# Altium PCB PCB1.PcbDoc (part 1 of 2)
Units mm, origin at the board's own origin, x right, y up, seen from the top; angles counter-clockwise.
Board outline 94.96 x 71.5 mm, 2 copper layers (Top Layer, Bottom Layer), stack 1.58 mm thick; 82 components, 66 nets, 273 pads, 293 vias.
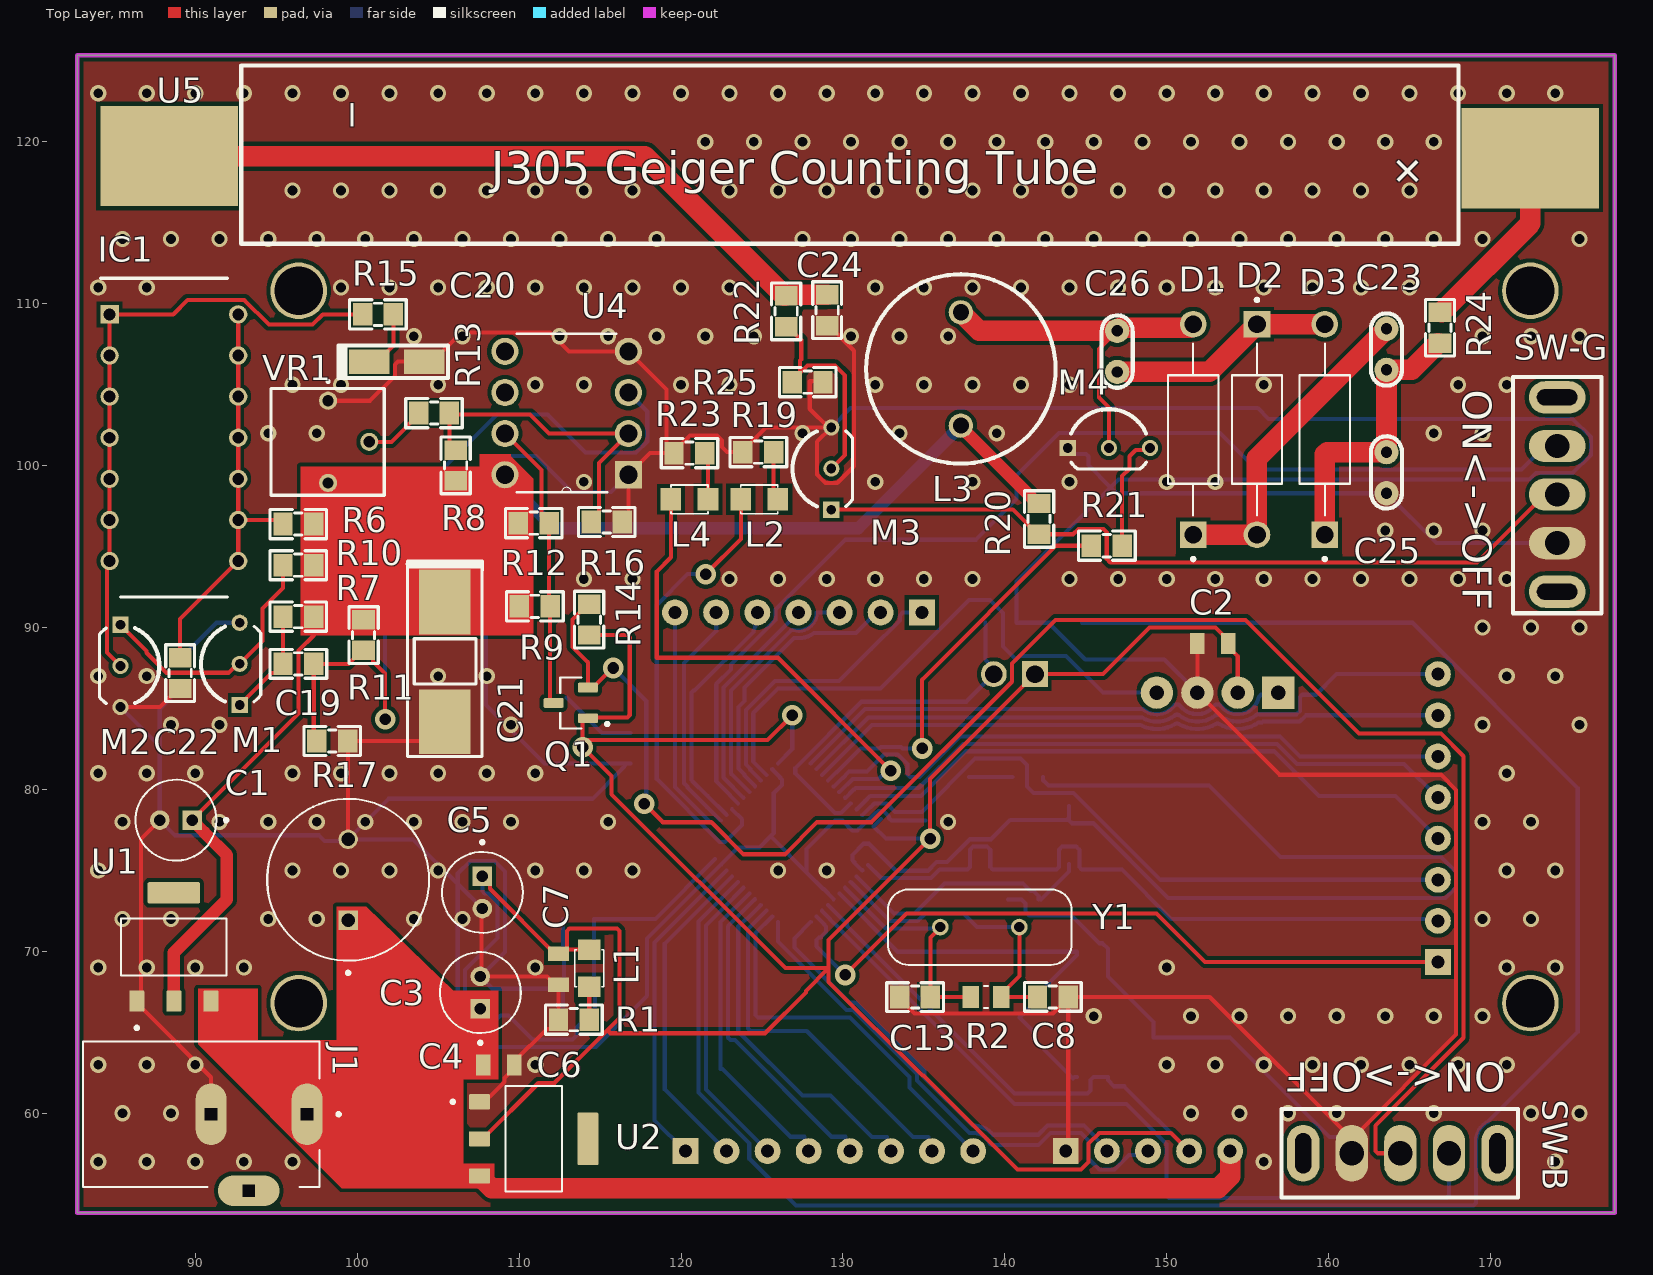
[diagram p0: Top Layer view]
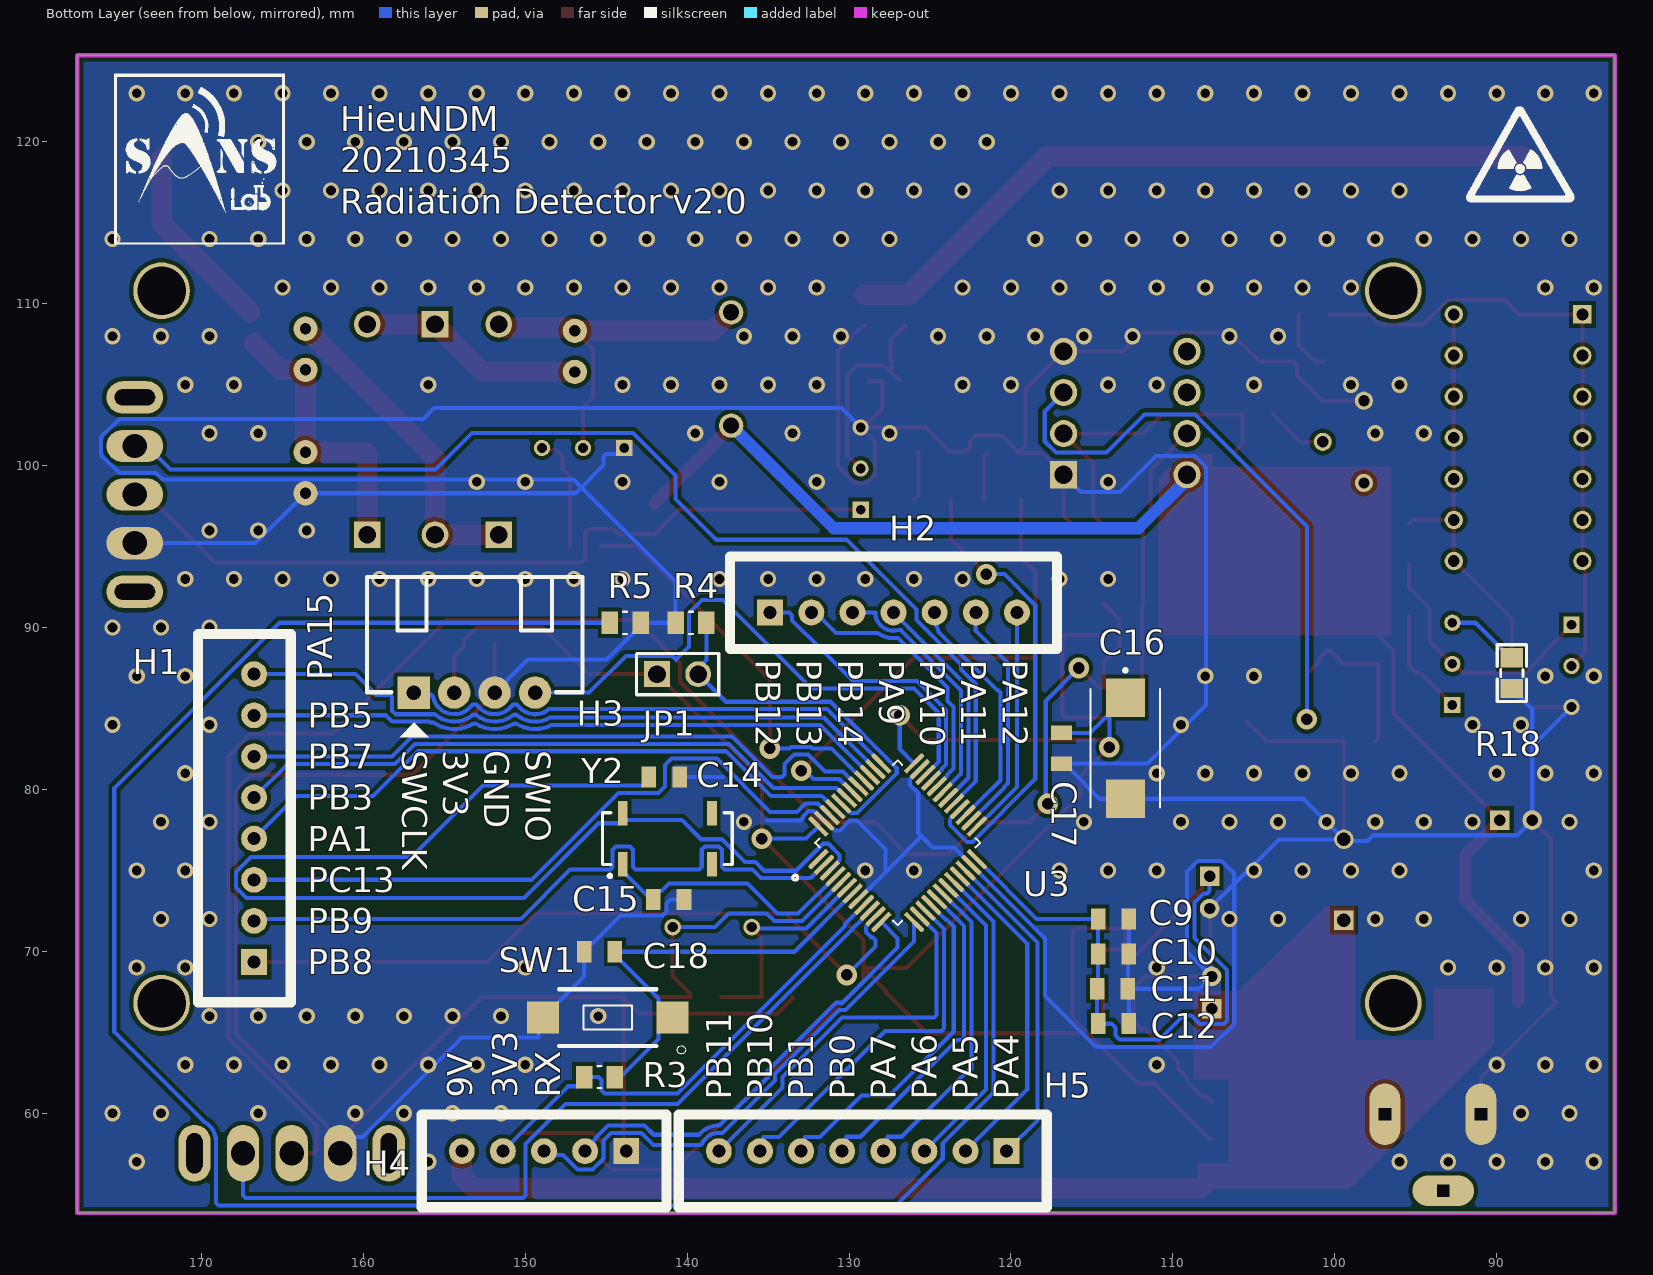
[diagram p1: Bottom Layer view, seen from below]
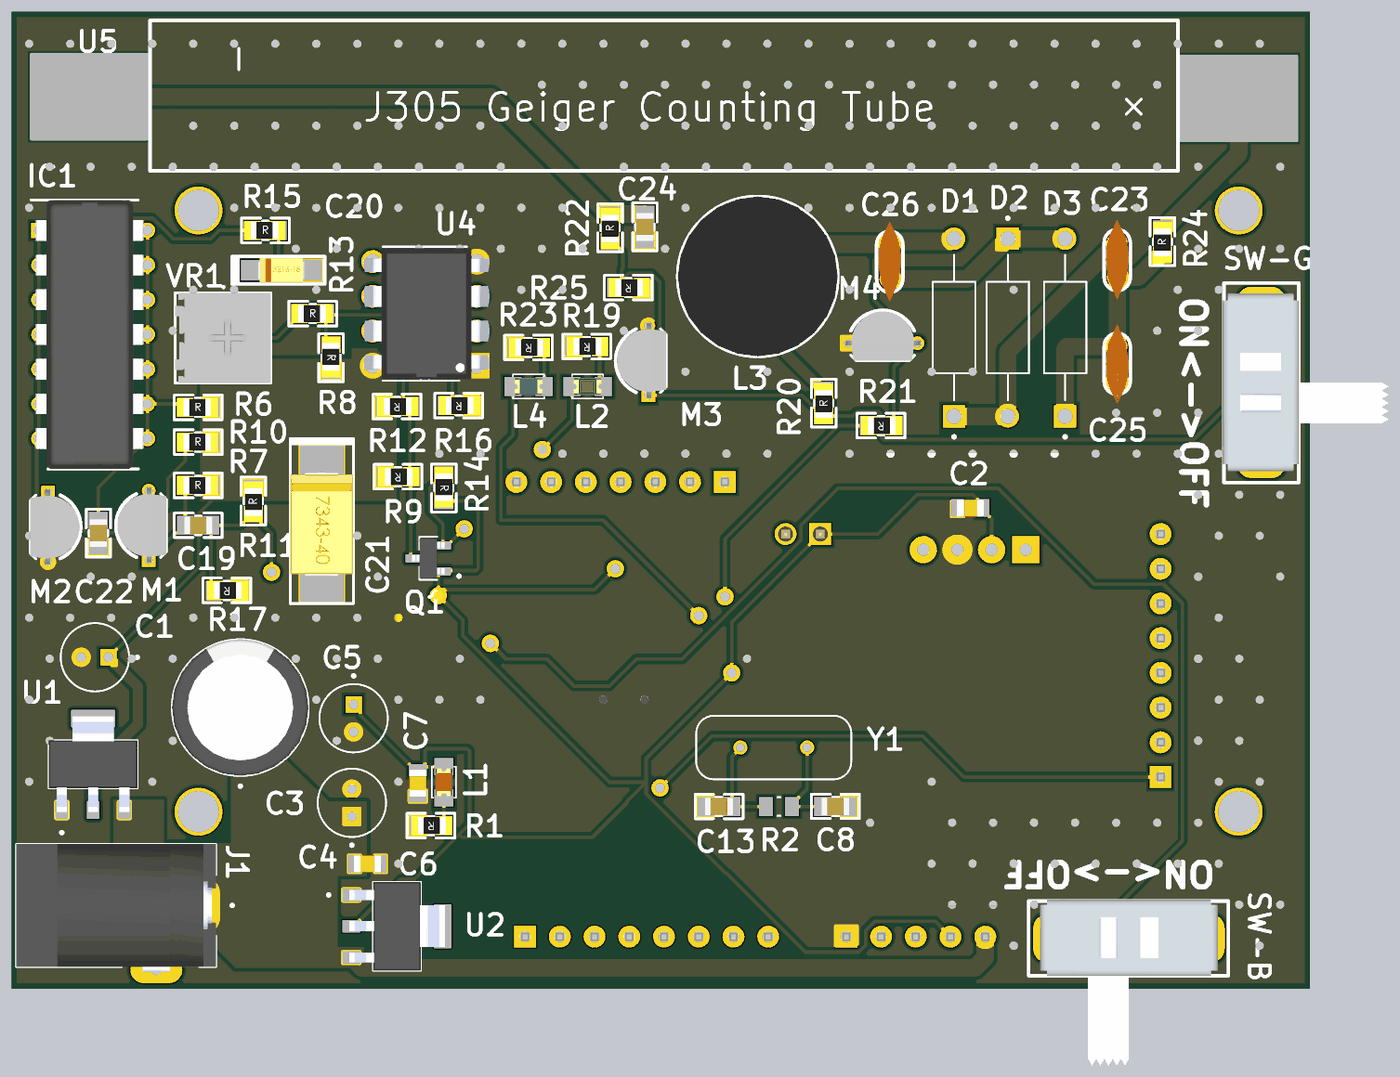
[diagram p2: 3D render of the assembled board from above, using the file's embedded part models]
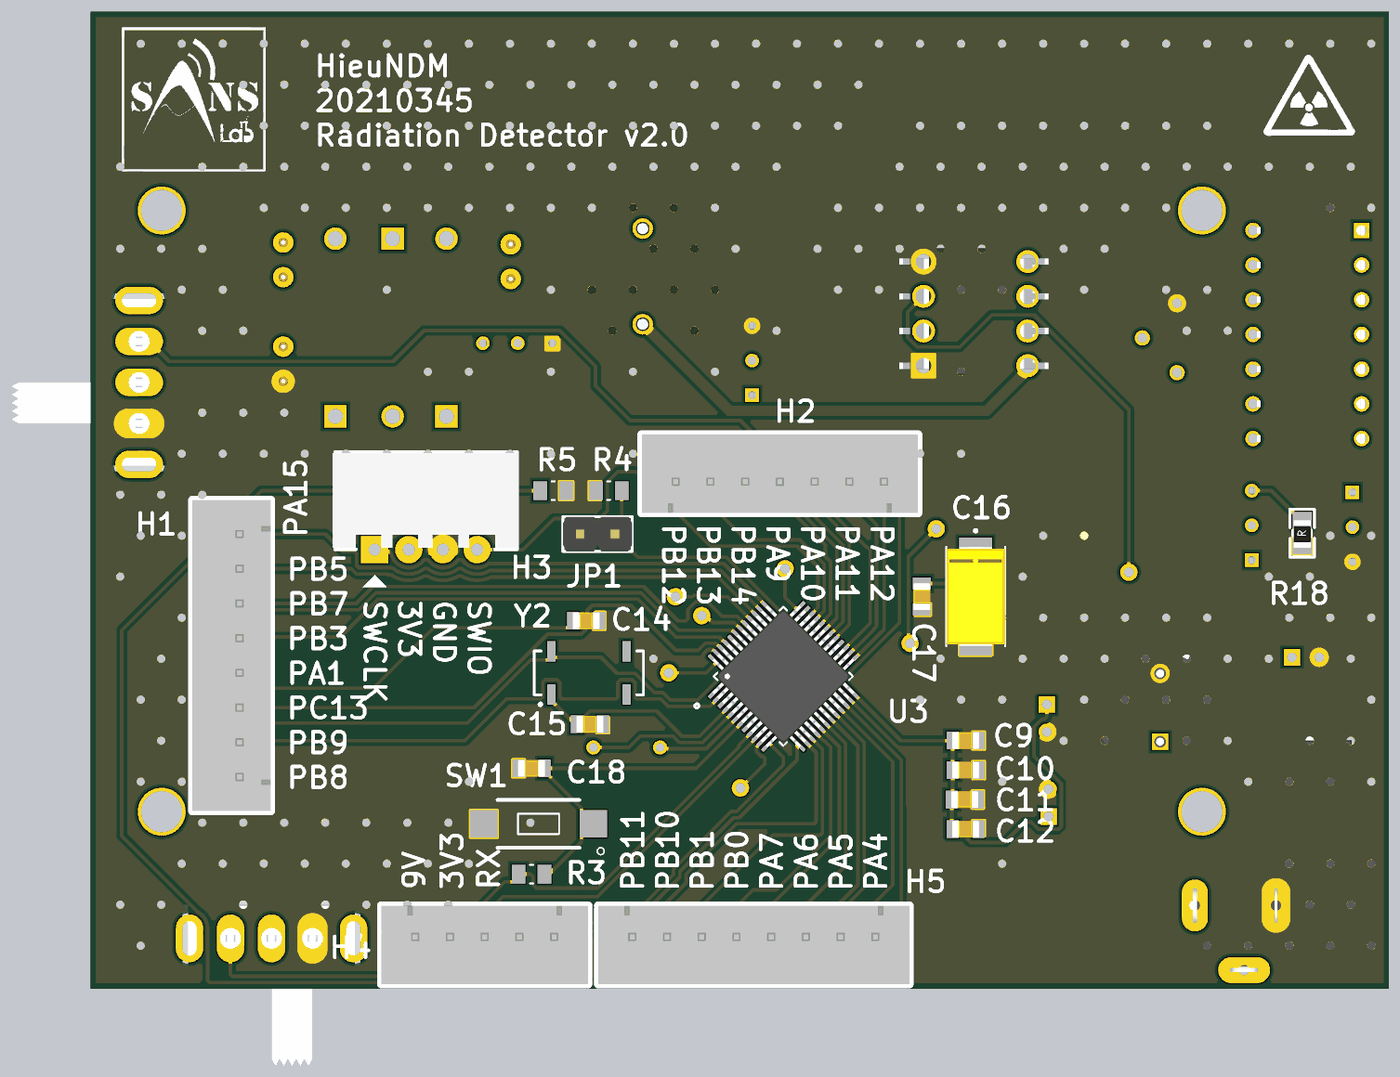
[diagram p3: 3D render of the assembled board from below, using the file's embedded part models]

## Layer stack, top to bottom
Top Solder: solder mask 0.01, Solder Resist, Dk 3.5
Top Layer: signal copper 0.035
Dielectric 1: dielectric 1.51, FR-4, Dk 4.8
Bottom Layer: signal copper 0.035
Bottom Solder: solder mask 0.01, Solder Resist, Dk 3.5

## Board outline
82.71,53.848 82.71,125.349 177.673,125.349 177.673,53.848

## Design rules (kind name [scope] priority, off if disabled: settings)
Clearance [All] p1: gap=0.254 ignorepadtopadclearanceinfootprint=FALSE except(0: Arc-Hole Track-Hole SMDPad-Hole THPad-Hole Via-Hole Fill-Hole Poly-Hole Region-Hole Text-Hole; 0.203: Arc-Arc Arc-Track Arc-SMDPad Arc-THPad Track-Track Track-SMDPad Track-THPad SMDPad-SMDPad SMDPad-THPad THPad-THPad)
PlaneConnect [All] p1: planeconnectstyle=Direct reliefexpansion=0.508 reliefentries=4 reliefconductorwidth=0.254 reliefairgap=0.254
PolygonConnect [All] p1: connectstyle=Direct reliefconductorwidth=0.254 reliefentries=4 polygonreliefangle="90 Angle" airgapwidth=0.254
RoutingVias [All] p1: holewidth=0.711 width=1.27 viastyle="Through Hole" minholewidth=0.254 minwidth=0.254 maxholewidth=0.711 maxwidth=1.27
SolderMaskExpansion [All] p1: expansion=0.102 istentingtop=FALSE
Width [All] p1: maxlimit=1.27 minlimit=0.254 preferedwidth=0.254 minimp=50.000000 maximp=50.000000 favimp=50.000000
29 further rules are at their usual default settings.

## Classes and differential pairs
component class Sensor: C19 C20 C21 C22 C23 C24 C25 C26 D1 D2 D3 IC1 L2 L3 L4 M1 M2 M3 M4 Q1 R6 R7 R8 R9 R10 R11 R12 R13 R14 R15 R16 R17 R18 R19 R20 R21 R22 R23 R24 R25 SW-B SW-G U4 U5 VR1
component class Microcontroller: C1 C2 C3 C4 C5 C6 C7 C8 C9 C10 C11 C12 C13 C14 C15 C16 C17 C18 H1 H2 H3 H4 H5 J1 JP1 L1 R1 R2 R3 R4 R5 SW1 U1 U2 U3 Y1 Y2

## Components (designator, comment, footprint, x,y, rotation, side; value= is the part's Value field where it differs from the comment)
C1 "22uF" CAPPRD200W50D550H1250 88.806,78.105 r180 top
C2 "100nF" WCAP-CSST_0805_L2W1.25H1.25 152.842,89.027 r180 top
C3 "100uF" CAPPRD500W60D1000H1250 99.441,74.422 r90 top
C4 "22uF" CAPPRD200W50D550H1250 107.602,67.453 r90 top
C5 "22uF" CAPPRD200W50D550H1250 107.729,73.644 r270 top
C6 "100nF" WCAP-CSST_0805_L2W1.25H1.25 108.745,62.992 r180 top
C7 "100nF" WCAP-CSST_0805_L2W1.25H1.25 112.428,68.895 r90 top
C8 "20pF" "tu 0805" 142.964,67.186 r0 top
C9 "100nF" WCAP-CSST_0805_L2W1.25H1.25 113.665,72.009 r0 bottom
C10 "100nF" WCAP-CSST_0805_L2W1.25H1.25 113.665,69.85 r0 bottom
C11 "100nF" WCAP-CSST_0805_L2W1.25H1.25 113.726,67.691 r0 bottom
C12 "100nF" WCAP-CSST_0805_L2W1.25H1.25 113.665,65.532 r0 bottom
C13 "20pF" "tu 0805" 134.458,67.18 r180 top
C14 "10pF" WCAP-CSGP_0805_L2W1.25H0.6_Reflow 141.417,80.772 r0 bottom
C15 "10pF" WCAP-CSGP_0805_L2W1.25H0.6_Reflow 141.15,73.203 r0 bottom
C16 "10uF" CAPMP7343X430N 112.936,82.55 r270 bottom
C17 "100nF" WCAP-CSST_0805_L2W1.25H1.25 116.873,82.55 r90 bottom
C18 "100nF" WCAP-CSST_0805_L2W1.25H1.25 145.415,69.977 r180 bottom
C19 "104" "tu 0805" 96.361,87.76 r0 top
C20 "10uF" "tu tantalum smd3216" 102.444,106.426 r0 top
C21 "100uF" "tu tantalum smd7343" 105.41,87.884 r270 top
C22 "104" "tu 0805" 89.063,87.192 r270 top
C23 "103" "tu gom" 163.576,107.188 r90 top
C24 "47pF" "tu 0805" 129.032,109.601 r270 top
C25 "103" "tu gom" 163.576,99.568 r270 top
C26 "103" "tu gom" 146.939,107.061 r90 top
D1 "MUR160" DIOAD1300W80L670D310 151.638,102.235 r90 top
D2 "MUR160" DIOAD1300W80L670D310 155.575,102.235 r270 top
D3 "MUR160" DIOAD1300W80L670D310 159.766,102.235 r90 top
H1 "Header 8P 2.54 Duc Thang" XH2.54M-8 166.751,69.342 r90 bottom
H2 "Header 7P 2.54 Duc Thang" XH2.54M-7 134.874,90.932 r180 bottom
H3 "" "Header 4P DC 2.54" 156.867,86.004 r90 bottom
H4 "" XH2.54M-5 143.764,57.658 r0 bottom
H5 "Header 8P 2.54 Duc Thang" XH2.54M-8 120.269,57.658 r0 bottom
IC1 "SN74LS92N" DIP794W53P254L1930H508Q14N 88.679,101.727 r0 top
J1 "EJ503A" MPD_EJ503A 90.361,59.944 r270 top
JP1 "JP 1x2 2.54" "JP 1x2 DT" 141.859,87.122 r180 bottom
L1 "LED 0805" LED-0805-Red 114.333,70.104 r270 top
L2 "LED 0805" LED-0805-Green 123.698,97.917 r0 top
L3 "10mH" RLB1314-101KL 137.287,105.974 r90 top
L4 "LED 0805" LED-0805-Blue 119.38,97.917 r0 top
M1 "BC549C" BC549C 92.743,87.757 r90 top
M2 "BC549C" BC549C 85.377,87.63 r270 top
M3 "2N3904" BC549C 129.286,99.822 r90 top
M4 "" MJE13003 146.431,101.092 r0 top
Q1 "BSS138" SOT95P240X111-3N 113.19,85.344 r180 top
R1 "680R" "Tro SMD 0805" 113.387,65.725 r180 top
R2 "1M" RESC2012X65N 138.838,67.183 r180 top
R3 "10K" RESC2012X65N 145.415,62.23 r0 bottom
R4 "100K" RESC2012X65N 139.766,90.297 r0 bottom
R5 "100K" RESC2012X65N 143.83,90.297 r180 bottom
R6 "220k" "tro smd 0805" 96.361,96.454 r0 top
R7 "4.7k" "tro smd 0805" 96.361,90.739 r0 top
R8 "100k" "tro smd 0805" 106.139,100.019 r270 top
R9 "33k" "tro smd 0805" 110.974,91.252 r180 top
R10 "220k" "tro smd 0805" 96.361,93.914 r0 top
R11 "100k" "tro smd 0805" 100.33,89.535 r90 top
R12 "10k" "tro smd 0805" 110.904,96.393 r180 top
R13 "2.2M" "tro smd 0805" 104.743,103.312 r0 top
R14 "10k" "tro smd 0805" 114.394,90.494 r270 top
R15 "2.2M" "tro smd 0805" 101.281,109.408 r0 top
R16 "33k" "tro smd 0805" 115.414,96.459 r180 top
R17 "33k" "tro smd 0805" 98.458,82.931 r180 top
R18 "1k" "tro smd 0805" 89.121,87.184 r90 bottom
R19 "510R" "tro smd 0805" 124.779,100.777 r180 top
R20 "10k" "tro smd 0805" 142.052,96.709 r90 top
R21 "200R" "tro smd 0805" 146.304,94.996 r180 top
R22 "22k" "tro smd 0805" 126.431,109.531 r90 top
R23 "680R" "Tro SMD 0805" 120.523,100.711 r180 top
R24 "20M" "tro smd 0805" 166.817,108.52 r90 top
R25 "22k" "tro smd 0805" 127.827,105.095 r180 top
SW1 "" SW_RS-032G05A3-SMRT 144.907,65.913 r0 bottom
SW-B "Switch" Switch 170.434,57.531 r180 top (schematic designator S1)
SW-G "Switch" Switch 174.117,104.219 r270 top (schematic designator S2)
U1 "AMS1117-5.0" SOT229P700X180-4N 88.675,70.274 r90 top
U2 "AMS1117-3.3" SOT229P700X180-4N 110.904,58.42 r0 top
U3 "STM32F103C8T6" QFP50P900X900X160-48N 127,76.708 r135 bottom
U4 "LM311N" LM311N 109.126,107.061 r180 top
U5 "J305 Geiger Counting Tube" GEIGER-TUBE-SMD_J305 128.143,123.825 r0 top
VR1 "" 3362P_1 94.674,101.473 r270 top
Y1 "8MHz" XTAL_ECS-80-S-4X 138.457,71.501 r0 top
Y2 "32.768KHz" OSCL550P800X320X254-4N 141.224,76.962 r90 bottom

## Footprints (in the part's own frame and the unit in brackets; to place one, negate y for a bottom-side part, rotate by r counter-clockwise, add the part's x,y. Pads: shape width x height; smd on the part's side, far side on the other; paste and mask are expansions set on the pad)
3362P_1 [mm]
  round 1.12 hole 0.69: 1(-2.54,3.53) 2(0,6.07) 3(2.54,3.53)
  silkscreen extent -3.78,0 3.3,6.99, body extent -3.3,0 3.3,6.99, height 4.61
BC549C [mm]
  rect 1x1 hole 0.6: 1(-2.54,0)
  round 1 hole 0.6: 2(0,0) 3(2.54,0)
  silkscreen extent -2.34,-1.3 2.32,2.4, body extent -2.74,-1.3 2.74,2.3, height 8.6
CAPMP7343X430N [mm]
  rect 2.37x2.41 smd: 1(-3.125,0) 2(3.125,0)
  silkscreen extent -4.91,-2.15 3.65,2.15, body extent -3.65,-2.15 3.65,2.15, height 4.3
CAPPRD200W50D550H1250 [mm]
  rect 1.208x1.208 hole 0.7: 1(-1,0)
  round 1.208 hole 0.7: 2(1,0)
  silkscreen extent -3.2,-2.5 2.5,2.5
CAPPRD500W60D1000H1250 [mm]
  round 1.2 hole 0.85: N(2.5,0)
  rect 1.2x1.2 hole 0.85: P(-2.5,0)
  silkscreen extent -5.85,-5 5,5, body extent -5,-5 5,5, height 12.5
DIOAD1300W80L670D310 [mm]
  round 1.65 hole 1.1: A(6.5,0)
  rect 1.65x1.65 hole 1.1: C(-6.5,0)
  silkscreen extent -8.1,-1.55 5.32,1.55
DIP794W53P254L1930H508Q14N [mm]
  rect 1.13x1.13 hole 0.73: 1(-3.97,7.62)
  round 1.13 hole 0.73: 2(-3.97,5.08) 3(-3.97,2.54) 4(-3.97,0) 5(-3.97,-2.54) 6(-3.97,-5.08) 7(-3.97,-7.62) 8(3.97,-7.62) 9(3.97,-5.08) 10(3.97,-2.54) 11(3.97,0) 12(3.97,2.54) 13(3.97,5.08) 14(3.97,7.62)
  silkscreen extent -4.53,-9.84 3.3,9.84, body extent -4.19,-9.84 3.68,9.84, height 5.27
GEIGER-TUBE-SMD_J305 [mil]
  rect 334.5x244 smd paste+4 mask+2: 1(1745,-190) 2(-1565,-185)
  silkscreen extent -1390,-398 1570,35
"Header 4P DC 2.54" [mil]
  rect 78.74x78.74 hole 35: 1(-1,1)
  round 78.74 hole 35: 2(-1,-97.43) 3(-1,-195.85) 4(-1,-294.28)
  silkscreen extent -110,-409 280,115, body extent 5,-413 278,122, height 290
"JP 1x2 DT" [mm] "2 pins, 1 row, straight, gold plating"
  rect 1.6x1.6 hole 1.1: 1(0,0)
  round 1.6 hole 1.1: 2(2.54,0)
  silkscreen extent -1.27,-1.27 3.81,1.27, body extent -1.27,-1.27 3.81,1.27, height 8.54
LED-0805-Blue [mil]
  rect 50x55 smd: 1(0,0) 2(90,0)
  silkscreen extent 0,-35 90,35, body extent 5,-25 85,25, height 43
LED-0805-Green [mil]
  rect 50x55 smd: 1(0,0) 2(90,0)
  silkscreen extent 0,-35 90,35, body extent 5,-25 85,25, height 43
LED-0805-Red [mil]
  rect 50x55 smd: 1(0,0) 2(90,0)
  silkscreen extent 0,-35 90,35, body extent 5,-25 85,25, height 43
LM311N [mil]
  rect 66x66 hole 44: 1(-300,300)
  round 66 hole 44: 2(-300,200) 3(-300,100) 4(-300,0) 5(0,0) 6(0,100) 7(0,200) 8(0,300)
  silkscreen extent -271,-43 -29,343, body extent -370,-39 60,339, height 210
MJE13003 [mm]
  round 1 hole 0.6: 1(0,0) 2(2.54,0)
  rect 1x1 hole 0.6: 3(-2.54,0)
  silkscreen extent -2.34,-1.3 2.32,2.4, body extent -2.74,-1.28 2.74,2.32, height 8.6
MPD_EJ503A [mm]
  oval 3.8x1.9 hole 0.76 square: 1(0,6.54) 2(0,0.61)
  oval 1.9x3.8 hole 0.76 square: 3(4.73,2.94)
  silkscreen extent -4.5,-7.31 4.5,8.59, body extent -4.5,-7.31 4.88,7.31, height 11
OSCL550P800X320X254-4N [mm]
  rect 1.5x0.6 smd: 1(-1.575,2.75) 2(-1.575,-2.75) 3(1.575,-2.75) 4(1.575,2.75)
  silkscreen extent -2.4,-4 1.6,4
QFP50P900X900X160-48N [mm]
  rrect50% 1.56x0.28 smd: 1(-4.18,2.75) 2(-4.18,2.25) 3(-4.18,1.75) 4(-4.18,1.25) 5(-4.18,0.75) 6(-4.18,0.25) 7(-4.18,-0.25) 8(-4.18,-0.75) 9(-4.18,-1.25) 10(-4.18,-1.75) 11(-4.18,-2.25) 12(-4.18,-2.75) 25(4.18,-2.75) 26(4.18,-2.25) 27(4.18,-1.75) 28(4.18,-1.25) 29(4.18,-0.75) 30(4.18,-0.25) 31(4.18,0.25) 32(4.18,0.75) 33(4.18,1.25) 34(4.18,1.75) 35(4.18,2.25) 36(4.18,2.75)
  rrect50% 0.28x1.56 smd: 13(-2.75,-4.18) 14(-2.25,-4.18) 15(-1.75,-4.18) 16(-1.25,-4.18) 17(-0.75,-4.18) 18(-0.25,-4.18) 19(0.25,-4.18) 20(0.75,-4.18) 21(1.25,-4.18) 22(1.75,-4.18) 23(2.25,-4.18) 24(2.75,-4.18) 37(2.75,4.18) 38(2.25,4.18) 39(1.75,4.18) 40(1.25,4.18) 41(0.75,4.18) 42(0.25,4.18) 43(-0.25,4.18) 44(-0.75,4.18) 45(-1.25,4.18) 46(-1.75,4.18) 47(-2.25,4.18) 48(-2.75,4.18)
  silkscreen extent -6.15,-3.6 3.6,3.6, body extent -4.5,-4.5 4.5,4.5, height 1.6
RESC2012X65N [mm]
  rect 1.01x1.38 smd: 1(-0.95,0) 2(0.95,0)
  silkscreen extent -0.12,-0.68 0.12,0.68
RLB1314-101KL [mm]
  round 1.5 hole 1: 1(-3.5,0) 2(3.5,0)
  silkscreen extent -5.85,-5.85 5.85,5.85, body extent -5.85,-5.85 5.85,5.85, height 13
SOT95P240X111-3N [mm]
  rrect25% 1.23x0.6 smd: 1(-1.06,0.95) 2(-1.06,-0.95) 3(1.06,0)
  silkscreen extent -2.35,-1.57 0.65,1.57, body extent -1.2,-1.45 1.2,1.45, height 1.11
SOT229P700X180-4N [mm]
  rrect15% 1.31x0.93 smd: 1(-3.345,2.29) 2(-3.345,0) 3(-3.345,-2.29)
  rrect15% 1.31x3.24 smd: 4(3.345,0)
  silkscreen extent -5.1,-3.25 1.75,3.25, body extent -3.5,-3.25 3.5,3.25, height 1.8
SW_RS-032G05A3-SMRT [mm]
  rect 2x2 smd: 1(-4,0) 2(4,0)
  silkscreen extent -4.8,-1.75 3,2.25
Switch [mm]
  oval 2x3.5 hole 1.5: 1(3,0) 2(6,0) 3(9,0)
  oval 2x3.5 hole 1 slot 2.5 at 90 deg: 4(0,0) 5(12,0)
  silkscreen extent -1.27,-2.73 13.34,2.73, body extent -0.5,-2.85 12.5,9.35, height 2.6
"Tro SMD 0805" [mm]
  rect 1.2x1.4 smd: 1(-0.946,-0.061) 2(0.954,-0.061)
  silkscreen extent -1.75,-0.97 1.75,0.84, body extent -1.56,-0.76 1.44,0.64, height 0.53
"tro smd 0805" [mm]
  rect 1.2x1.4 smd: 1(-0.946,-0.061) 2(0.954,-0.061)
  silkscreen extent -1.75,-0.97 1.75,0.84, body extent -1.56,-0.76 1.44,0.64, height 0.53
"tu 0805" [mm] "Compoment SMD 80x50mil"
  rect 1.2x1.4 smd: 1(-0.946,-0.003) 2(0.954,-0.003)
  silkscreen extent -1.75,-0.89 1.75,0.89, body extent -1.01,-0.64 1.01,0.63, height 0.61
"tu gom" [mm] "Tu gom mini"
  round 1.5 hole 0.7: 1(-1.27,0) 2(1.27,0)
  silkscreen extent -2.25,-0.97 2.22,0.97, body extent -2.92,-0.85 2.92,0.85, height 6.12
"tu tantalum smd3216" [mm]
  rect 2.5x1.5 smd: 1(-1.7,0) 2(1.7,0)
  silkscreen extent -3.61,-1 3.17,1, body extent -1.7,-0.9 1.7,0.9, height 1.69
"tu tantalum smd7343" [mm]
  rect 4x3.2 smd: 1(-3.7,0) 2(3.7,0)
  silkscreen extent -6.23,-2.31 5.85,2.31, body extent -3.75,-2.33 3.85,2.27, height 3.99
WCAP-CSGP_0805_L2W1.25H0.6_Reflow [mm] "Ceramic Capacitors, body 2x1.25mm"
  rect 0.9x1.3 smd: 1(-0.95,0) 2(0.95,0)
  body extent -1,-0.62 1,0.63, height 0.6
WCAP-CSST_0805_L2W1.25H1.25 [mm] "Soft Termination MLCC, body 2.00x1.25mm"
  rect 0.9x1.3 smd: 1(-0.95,0) 2(0.95,0)
  body extent -1,-0.63 1,0.63, height 1.25
XH2.54M-5 [mm]
  rect 1.6x1.6 hole 0.8: 1(0,0)
  round 1.6 hole 0.8: 2(2.54,0) 3(5.08,0) 4(7.62,0) 5(10.16,0)
  silkscreen extent -2.48,-2.26 12.64,3.46, body extent -2.48,-2.26 12.64,3.48, height 6.91
XH2.54M-7 [mm]
  rect 1.6x1.6 hole 0.8: 1(0,0)
  round 1.6 hole 0.8: 2(2.54,0) 3(5.08,0) 4(7.62,0) 5(10.16,0) 6(12.7,0) 7(15.24,0)
  silkscreen extent -2.48,-2.26 17.72,3.46, body extent -2.48,-2.26 17.72,3.48, height 6.91
XH2.54M-8 [mm]
  rect 1.6x1.6 hole 0.8: 1(0,0)
  round 1.6 hole 0.8: 2(2.54,0) 3(5.08,0) 4(7.62,0) 5(10.16,0) 6(12.7,0) 7(15.24,0) 8(17.78,0)
  silkscreen extent -2.48,-2.26 20.26,3.46, body extent -2.48,-2.26 20.26,3.48, height 6.91
XTAL_ECS-80-S-4X [mm]
  round 1.03 hole 0.63: 1(-2.44,0) 2(2.44,0)
  silkscreen extent -5.68,-2.33 5.68,2.33

## Part data
C1 C4 C5: library part UVR1E220MDD, "22ÂµF 25V Aluminum Electrolytic Capacitors Radial, Can 2000 Hrs @ 85Â°C", Package="Radial Nichicon", Availability=Good, MF=Nichicon, MP=UVR1E220MDD, Price=None, Purchase-URL=https://pricing.snapeda.com/search/part/UVR1E220MDD/?ref=eda, SnapEDA_Link=https://www.snapeda.com/parts/UVR1E220MDD/Nichicon/view-part/2301907/?ref=snap
C2 C6 C7 C9 C10 C11 C12 C17 C18: library part 885382207007, "WCAP-CSST Multilayer Ceramic Chip Capacitor, Soft Termination, SMT, size 0805, X7R Class II, 100nF, 50V", Capacitance Tolerance=+/-10%, Case/Size Code=0805, Insulation Resistance=5GOhm, Manufacturer="Wurth Elektronik", Operating Temperature Max=125°C, Operating Temperature Min=-55°C, Rated Voltage (DC)=50V, Capacitance=100nF, Category="Multilayer Ceramic Chip Capacitors", Ceramic Type="X7R Class II", ComponentLink1Description="Website Link", ComponentLink1URL=https://www.we-online.com/redexpert/article/885382207007?ad, ComponentLink2Description="Datasheet Link", ComponentLink2URL=https://www.we-online.com/redexpert/spec/885382207007?ad, Dissipation Factor=2.5%, Height=1.25mm, Length=2mm, Manufacturer Part Number=885382207007, Match Code=WCAP-CSST, Mount="Surface Mount", Packaging="Tape and Reel", Technical Reference=X7R0805104K050DFCT1S000, Width=1.25mm
C3: library part EEUTA1V101, "CAP ALUM 100UF 20% 35V RADIAL", Package="RADIAL-2 Panasonic", Availability="In Stock", Check_prices=https://www.snapeda.com/parts/EEUTA1V101/Panasonic/view-part/5783936/?ref=eda, MF=Panasonic, MP=EEUTA1V101, Price=None, SnapEDA_Link=https://www.snapeda.com/parts/EEUTA1V101/Panasonic/view-part/5783936/?ref=snap
C8 C13: library part "Tu 0805 20pF 50V 10%", "Dán", Chung_Loai=Dán, Don_Vi=Con, Ma_Hang=MH004558, So_Chan=2, Ten_Linh_Kien="Tụ 0805 20P 10% 50V"
C14 C15: library part 885012007051, "WCAP-CSGP Multilayer Ceramic Chip Capacitor, General Purpose, size 0805, NP0, 10pF, 50V", Capacitance Tolerance=+/-5%, Case/Size Code=0805, Insulation Resistance=10GΩ, Manufacturer="Wurth Elektronik", Max Operating Temperature=125°C, Min Operating Temperature=-55°C, Rated Voltage (DC)=50V, Capacitance=10pF, Category="Multilayer Ceramic Chip Capacitors", Ceramic Type=NP0, ComponentLink1Description="Website Link", ComponentLink1URL=https://www.we-online.com/redexpert/article/885012007051?ad, ComponentLink2Description="Datasheet Link", ComponentLink2URL=https://www.we-online.com/redexpert/spec/885012007051?ad, Height=0.6mm, Length=2mm, Manufacturer Part Number=885012007051, Match Code=WCAP-CSGP, Mount="Surface Mount", Packaging="Tape and Reel", Q Factor=600, Technical Reference=NP00805100J050DFCT10000, Width=1.25mm
C16: library part T493X106K035AK6120, "Tantalum Capacitors - Solid SMD T493_COTS, Tantalum, MnO2 Tantalum, COTS, 10 uF, 10%, 35 VDC, SMD, MnO2, Molded, COTS, N/A, 250 mOhms, 7343, Height Max = 4.3mm", Package="SMD-2 Kemet", Check_prices=https://www.snapeda.com/parts/T493X106K035AK6120/Kemet/view-part/?ref=eda, MF=Kemet, MP=T493X106K035AK6120, SnapEDA_Link=https://www.snapeda.com/parts/T493X106K035AK6120/Kemet/view-part/?ref=snap
C19 C22: library part "Tu 0805 104 50V 10%", "Dán", Chung_Loai=Dán, Don_Vi=Con, Ma_Hang=MH004551, So_Chan=2, Ten_Linh_Kien="Tụ 0805 104-100nF 10% 50V"
C20: library part "Tu tantalum 10uF 16V SMD3216", "Dán", Chung_Loai=Dán, Don_Vi=Con, Ma_Hang=MH001954, So_Chan=2, Ten_Linh_Kien="Tụ tantalum 106C-10uF 16V SMD3216"
C21: library part "Tu tantalum 100uF 16V SMD7343", "Dán", Chung_Loai=Dán, Don_Vi=Con, Ma_Hang=MH002346, So_Chan=2, Ten_Linh_Kien="Tụ tantalum 107C-100uF 16V SMD7343"
C23 C25 C26: library part "Tu gom 103 50V", "Cắm", Chung_Loai=Cắm, Don_Vi=Con, Ma_Hang=MH000936, So_Chan=2, Ten_Linh_Kien="Tụ gốm 103 10nF 50V"
C24: library part "Tu 0805 33pF 50V 10%", "Dán", Chung_Loai=Dán, Don_Vi=Con, Ma_Hang=MH004563, So_Chan=2, Ten_Linh_Kien="Tụ 0805 33p 10% 50V"
D1 D2 D3: "Diode", Arrow Part Number=UF4007, Manufacturer_Name=onsemi, Mouser Part Number=512-UF4007, Arrow Price/Stock=https://www.arrow.com/en/products/uf4007/on-semiconductor?utm_currency=USD&region=europe, Datasheet Link=https://www.onsemi.com/pub/Collateral/UF4007-D.pdf, Manufacturer_Part_Number=UF4007, Mouser Price/Stock=https://www.mouser.co.uk/ProductDetail/onsemi-Fairchild/UF4007?qs=NwIfwa72FlplAHiXupLMBA%3D%3D
H1 H2 H5: "Cắm", Chung_Loai=Cắm, Don_Vi=Con
  H1 H5: Ma_Hang=MH003366, Ten_Linh_Kien="Header 8P XH2.54-8P Đực Thẳng"
  H2: Ma_Hang=MH003369, Ten_Linh_Kien="Header 7P XH2.54-7P Đực Thẳng"
H3: library part "Header 4P 2.54 Duc Cong", "Cắm", Chung_Loai=Cắm, Don_Vi=Con, Ma_Hang=MH001310, Ten_Linh_Kien="Header 4P XH2.54-4P Đực Cong"
H4: library part "Header 5P 2.54 Duc Thang", "Cắm", Chung_Loai=Cắm, Don_Vi=Con, Ma_Hang=MH001298, Ten_Linh_Kien="Header 5P XH2.54-5P Đực Thẳng"
IC1: "Integrated Circuit", Manufacturer_Name="Texas Instruments", Mouser Part Number=595-SN74LS92N, Arrow Part Number=SN74LS92N, Arrow Price/Stock=https://www.arrow.com/en/products/sn74ls92n/texas-instruments?utm_currency=USD&region=nac, Datasheet Link=http://www.ti.com/lit/gpn/sn74ls92, Height=5.08mm, Manufacturer_Part_Number=SN74LS92N, Mouser Price/Stock=https://www.mouser.co.uk/ProductDetail/Texas-Instruments/SN74LS92N?qs=UG%2F8xqv%2F6WcRLlC4vw0bYA%3D%3D
J1: "Power Barrel Connector Jack 2.10mm ID (0.083), 5.50mm OD (0.217) Through Hole, Right Angle", Package=None, Availability="In Stock", Check_prices=https://www.snapeda.com/parts/EJ503A/MPD+%2528Memory+Protection+Devices%2529/view-part/?ref=eda, MF=MPD, MP=EJ503A, Price=None, Purchase-URL=https://pricing.snapeda.com/search?q=EJ503A&ref=eda, SnapEDA_Link=https://www.snapeda.com/parts/EJ503A/MPD+%2528Memory+Protection+Devices%2529/view-part/?ref=snap
JP1: library part "JP 1x2 2.54 Duc Thang", "Cắm", Chung_Loai=Cắm, Don_Vi=Con, Ma_Hang=MH000903, Ten_Linh_Kien="Jump Đơn Đực 2.54MM 1x40P Thẳng 11MM"
L1: library part "LED 0805 Do", "Dán", Chung_Loai=Dán, Don_Vi=Con, Ma_Hang=MH000897, Ten_Linh_Kien="LED 0805 Màu Đỏ (Red)"
L2: library part "LED 0805 Xanh La", "Dán", Chung_Loai=Dán, Don_Vi=Con, Ma_Hang=MH002326, Ten_Linh_Kien="LED 0805 Màu Xanh Lá (Green)"
L3: library part RLB1314-101KL, "Inductor", Manufacturer_Name=Bourns, Mouser Part Number=652-RLB1314-101KL, Arrow Part Number=RLB1314-101KL, Arrow Price/Stock=https://www.arrow.com/en/products/rlb1314-101kl/bourns?region=europe, Datasheet Link=https://datasheet.datasheetarchive.com/originals/distributors/SFDatasheet-7/sf-000140383.pdf, Manufacturer_Part_Number=RLB1314-101KL, Mouser Price/Stock=https://www.mouser.co.uk/ProductDetail/Bourns/RLB1314-101KL?qs=AC4ivEYFOTANeGVpHnHmUA%3D%3D
L4: library part "LED 0805 Xanh Duong", "Dán", Chung_Loai=Dán, Don_Vi=Con, Ma_Hang=MH002327, Ten_Linh_Kien="LED 0805 Màu Xanh Dương (Blue)"
M3: library part BC549C, ki_description="N-Channel Power-MOSFET", ki_keywords="MOSFET N-channel"
M4: library part MJE13003, ki_description="N-Channel Power-MOSFET", ki_keywords="MOSFET N-channel"
Q1: "N-Channel 50 V 220mA (Ta) 350mW (Ta) Surface Mount SOT-23-3", Package="SOT-23-3 ON Semiconductor", Check_prices=https://www.snapeda.com/parts/BSS138/Onsemi/view-part/?ref=eda, MF=onsemi, MP=BSS138, SnapEDA_Link=https://www.snapeda.com/parts/BSS138/Onsemi/view-part/?ref=snap
R1 R23: library part "Tro 0805 5% 680R", "Dán", Chung_Loai=Dán, Don_Vi=Con, Ma_Hang=MH005344, So_Chan=2, Ten_Linh_Kien="Trở 0805 5% 680R"
R2: library part RP73D2A1M0BTDF, "Res Thin Film 0805 1M Ohm 0.1% 0.125W(1/8W) Â±15ppm/C Epoxy Pad SMD T/R", Package=None, Availability=Unavailable, MP=RP73D2A1M0BTDF, Price=None
R3 R4 R5: library part RMCF0805FT10K0, Package=None, Availability=Unavailable, MF="{'manufacturer': u'Stackpole Electronics Inc'}", MP=RMCF0805FT10K0, Price=None
R6 R10 R13 R15: library part "Tro 0805 5% 220k", "Dán", Chung_Loai=Dán, Don_Vi=Con, Ma_Hang=MH005258, So_Chan=2, Ten_Linh_Kien="Trở 0805 5% 220k"
R7: library part "Tro 0805 5% 4.7k", "Dán", Chung_Loai=Dán, Don_Vi=Con, Ma_Hang=MH005307, So_Chan=2, Ten_Linh_Kien="Trở 0805 5% 4.7k"
R8 R11: library part "Tro 0805 5% 100k", "Dán", Chung_Loai=Dán, Don_Vi=Con, Ma_Hang=MH005250, So_Chan=2, Ten_Linh_Kien="Trở 0805 5% 100k"
R9 R16 R17: library part "Tro 0805 5% 33k", "Dán", Chung_Loai=Dán, Don_Vi=Con, Ma_Hang=MH005316, So_Chan=2, Ten_Linh_Kien="Trở 0805 5% 33k"
R12 R14 R20: library part "Tro 0805 5% 10k", "Dán", Chung_Loai=Dán, Don_Vi=Con, Ma_Hang=MH005239, So_Chan=2, Ten_Linh_Kien="Trở 0805 5% 10k"
R18: library part "Tro 0805 1% 1k", "Dán", Chung_Loai=Dán, Don_Vi=Con, Ma_Hang=MH005468, So_Chan=2, Ten_Linh_Kien="Trở 0805 1% 1k"
R19: library part "Tro 0805 1% 510k", "Dán", Chung_Loai=Dán, Don_Vi=Con, Ma_Hang=MH005486, So_Chan=2, Ten_Linh_Kien="Trở 0805 1% 510k"
R21: library part "Tro 0805 5% 200R", "Dán", Chung_Loai=Dán, Don_Vi=Con, Ma_Hang=MH005257, So_Chan=2, Ten_Linh_Kien="Trở 0805 5% 200R"
R22 R24 R25: library part "Tro 0805 5% 22k", "Dán", Chung_Loai=Dán, Don_Vi=Con, Ma_Hang=MH005248, So_Chan=2, Ten_Linh_Kien="Trở 0805 5% 22k"
SW1: library part RS-032G05A3-SMRT, "Tactile Switch SPST-NO Top Actuated Surface Mount", Package=None, Availability=Unavailable, MF=C&K, MP=RS032G05A3SMRT, Price=None, SnapEDA_Link=https://www.snapeda.com/parts/RS032G05A3SMRT/C%26K/view-part/578384/?ref=snap
U1: "1A LOW DROPOUT VOLTAGE REGULATOR", Package="SOT-223 Seeed Technology", Availability="Not in stock", Check_prices=https://www.snapeda.com/parts/AMS1117-5.0/ams/view-part/?ref=eda, MF=ams, MP=AMS1117-5.0, Price=None, SnapEDA_Link=https://www.snapeda.com/parts/AMS1117-5.0/ams/view-part/?ref=snap
U2: "Sot223/Pkg 1-Amp 3.3-Volt Low Drop Out Voltage Regulatator", Package="SOT-223 Seeed Technology", Availability="Not in stock", Check_prices=https://www.snapeda.com/parts/AMS1117-3.3/Advanced+Monolithic+Systems/view-part/?ref=eda, MF="Advanced Monolithic Systems", MP=AMS1117-3.3, Price=None, SnapEDA_Link=https://www.snapeda.com/parts/AMS1117-3.3/Advanced+Monolithic+Systems/view-part/?ref=snap
U3: "ARM® Cortex®-M3 STM32F1 Microcontroller IC 32-Bit 72MHz 64KB (64K x 8) FLASH 48-LQFP (7x7)", Package="LQFP-48 STMicroelectronics", Check_prices=https://www.snapeda.com/parts/STM32F103C8T6/STMicroelectronics/view-part/?ref=eda, MF=STMicroelectronics, MP=STM32F103C8T6, SnapEDA_Link=https://www.snapeda.com/parts/STM32F103C8T6/STMicroelectronics/view-part/?ref=snap
U4: "Comparator General Purpose DTL, MOS, Open-Collector, Open-Emitter, RTL, TTL 8-PDIP", Package="PDIP-8 ON Semiconductor", Availability=Bad, Check_prices=https://www.snapeda.com/parts/LM311N/ON%20Semiconductor/view-part/11709/?ref=eda, MF="ON Semiconductor", MP=LM311N, Price=None, SnapEDA_Link=https://www.snapeda.com/parts/LM311N/ON%20Semiconductor/view-part/11709/?ref=snap
VR1: library part 3362P-1-253LF, "Variable Resistor", Manufacturer_Name=Bourns, Mouser Part Number=652-3362P-1-253LF, Arrow Part Number=3362P-1-253LF, Arrow Price/Stock=https://www.arrow.com/en/products/3362p-1-253lf/bourns?region=nac, Datasheet Link=https://www.bourns.com/docs/Product-Datasheets/3362.pdf, Manufacturer_Part_Number=3362P-1-253LF, Mouser Price/Stock=https://www.mouser.co.uk/ProductDetail/Bourns/3362P-1-253LF?qs=zzU3Rk5EtVOwWhuxjgYxLA%3D%3D
Y1: library part ECS-80-S-4X, "CRYSTAL T/H", Package=None, Availability=Unavailable, MP=ECS-80-S-4X, Price=None
Y2: library part MC-306_32.7680K-A5:_ROHS, "32.768kHz Â±100ppm Crystal 12.5pF 50 kOhms 4-SOJ, 5.50mm pitch", Package="4-4 Epson", Availability=Unavailable, MF=EPSON, MP="MC-306 32.7680K-A5: ROHS", Price=None, SnapEDA_Link=https://www.snapeda.com/parts/MC-306%2032.7680K-A5%3A%20ROHS/EPSON/view-part/620500/?ref=snap
M1 M2: ki_description="N-Channel Power-MOSFET", ki_keywords="MOSFET N-channel"

## Free pads (board coordinates)
  round 3.5 hole 3: ""(96.386,66.802) ""(96.386,110.802) ""(172.466,66.802) ""(172.466,110.802)

## Via types
v1: diameter 1, hole 0.6, Top Layer to Bottom Layer, tented both sides, 283 vias
v2: diameter 1.27, hole 0.711, Top Layer to Bottom Layer, 10 vias

## Nets (pads, with @x,y where several pads share a name; then routed paths per layer and width w, separated by ;. In a path a pad name is that pad's centre, name@x,y a point inside that pad or via, vN(x,y) a via of type N, cw(c..) or ccw(c..) an arc to the next point about the centre after c; other vN are vias at no path point)
3V3: C2.1 C5.1 C7.2 C9.2 C10.2 C11.2 C12.2 C16.1 C17.2 H3.2 H4.4 JP1.1 L1.1 Q1.1 R3.2 R14.2 U2.2 U3.9 U3.24 U3.36 U3.48 | length 245.9
  Top Layer w0.254: U2.2 107.749,58.42 111.183,61.854 112.168,61.854 115.454,65.14 ; C5.1 108.206,74.167 108.206,73.867 112.228,69.845 C7.2 112.687,70.104 C7.2@112.887,70.104 ; v2@114.173,83.058 125.349,83.058 v2(126.873,84.582) ; L1.1 C7.2@112.887,70.104 ; R14.2 116.684,89.54 116.833,89.391 116.833,84.604 116.684,84.455 114.311,84.455 Q1.1 114.092,84.394 113.919,84.221 v2(113.919,82.616) 115.711,80.824 115.711,79.702 126.45,68.963 129.121,68.963 ; H4.4 150.254,58.788 145.836,58.788 145.174,58.126 145.174,57.001 144.701,56.528 140.778,56.528 134.981,62.325 134.918,62.325 129.121,68.121 129.121,68.963 ; H3.2@154.392,85.507 H3.2 154.392,88.227 153.792,88.827 C2.1 153.792,89.227 153.012,90.007 148.948,90.007 146.063,87.122 JP1.1 135.382,80.645 v2(135.382,76.962) 129.121,70.701 129.121,68.963 ; C7.2@112.887,70.104 112.951,70.168 112.951,71.256 113.1,71.405 116.056,71.405 116.205,71.256 116.205,65.891 115.454,65.14 ; 115.454,65.14 115.651,64.943 125.2,64.943 127.721,67.464 127.721,67.563 129.121,68.963
  Bottom Layer w0.254: C5.1@108.206,74.167 C5.1 107.729,73.727 107.878,73.578 108.116,73.578 108.663,73.031 108.663,70.835 106.668,68.84 106.668,65.712 106.861,65.519 108.343,65.519 108.864,66.04 109.347,66.04 110.835,64.552 113.302,64.552 113.543,64.793 113.543,65.291 113.784,65.532 C12.2 114.676,65.593 C11.2 114.615,67.752 C10.2 C9.2 118.412,72.009 U3.24 ; v2(113.919,82.616) 113.919,84.692 C16.1 112.956,85.675 115.131,83.5 C17.2 ; U3.36 126.873,82.492 v2(126.873,84.582) ; U3.9 130.242,71.699 130.242,71.561 140.593,61.21 145.107,61.21 145.3,61.403 145.3,62.051 145.479,62.23 R3.2 146.365,62.045 146.743,61.667 147.375,61.667 H4.4 ; U3.48@132.353,78.172 U3.48 132.657,76.962 v2(135.382,76.962)
+5: C1.1 C21.1 L3.1 R6.2 R7.2 R8.2 R9.2 R10.2 R11.2 R12.2 R20.2 U1.2 U4.8 VR1.3 | length 68.3
  Top Layer w0.254: C1.1 96.385,84.684 96.385,88.594 97.315,89.524 R7.2 ; 90.551,77.36 90.551,77.343 90.625,77.269 ; L3.1@137.287,102.389 L3.1 ; R20.2@142.013,97.663 R20.2
  Top Layer w0.762: U1.2 88.675,69.93 91.948,73.203 91.948,75.946 90.625,77.269 ; C1.1 90.551,77.36 ; L3.1@137.287,102.389 R20.2@142.013,97.663
  Bottom Layer w0.254: U4.8@109.126,99.154 U4.8
  Bottom Layer w0.762: U4.8@109.126,99.154 112.141,96.139 130.952,96.139 L3.1
+9: C3.P C4.1 C6.2 H4.5 J1.1 U1.3 U2.3 | length 48.5
  Top Layer w1.27: U2.3 108.317,55.372 153.18,55.372 153.924,56.116 H4.5
GND: C1.2 C2.2 C3.N C4.2 C5.2 C6.1 C7.1 C8.2 C9.1 C10.1 C11.1 C12.1 C13.2 C14.1 C15.1 C16.2 C17.1 C18.1 C20.2 C21.2 C22.2 C24.2 C25.2 H3.3 H4.1 J1.2 M2.3 M3.3 M4.3 R1.2 R4.2 R5.2 R16.1 R17.1 R18.1 R19.2 R23.2 R25.1 SW1.2 SW-B.3 SW-G.3 U1.1 U2.1 U3.8 U3.23 U3.35 U3.47 U4.1 U4.4 VR1.1 | length 549.4
  Top Layer w0.254: M2.3 87.812,85.09 88.96,86.238 C22.2 ; C1.2 86.653,76.952 86.653,67.197 U1.1 86.385,66.739 86.723,66.401 86.795,66.401 90.971,62.225 J1.2 ; VR1.1 100.798,104.013 102.324,105.539 102.324,106.237 102.513,106.426 C20.2 104.644,106.426 106.447,108.229 111.917,108.229 113.086,107.061 U4.4 119.096,104.711 119.096,101.245 R23.2 ; C3.N 99.441,82.954 R17.1 104.218,82.992 C21.2 ; U2.1 107.897,61.048 108.196,61.048 109.093,61.945 109.093,62.19 109.695,62.792 C6.1 109.695,63.192 111.716,65.213 111.96,65.213 112.433,65.686 112.428,65.691 C7.1 112.228,67.945 111.72,68.453 C4.2 107.665,68.516 107.665,72.581 C5.2 ; R16.1 116.746,96.906 U4.1 118.077,100.772 R23.2 ; R25.1 128.711,105.218 127.978,105.218 127.951,105.191 127.951,103.514 M3.3@129.103,102.362 ; C24.2 129.129,108.647 130.675,107.1 130.675,99.965 129.651,98.941 128.921,98.941 128.405,99.457 128.405,101.481 M3.3 M3.3@129.103,102.362 ; C13.2 133.504,67.083 134.434,66.153 142.988,66.153 C8.2@143.918,67.083 ; H4.1 143.918,57.812 C8.2@143.918,67.083 ; C2.2 H3.3 156.959,80.912 166.94,80.912 167.881,79.97 167.881,64.855 SW-B.3@161.434,58.408 ; SW-B.3 SW-B.3@161.434,58.408 ; R23.2 119.569,100.872 120.55,101.853 122.226,101.853 122.535,101.544 122.535,101.147 122.844,100.838 R19.2 123.825,100.938 125.249,102.362 M3.3@129.103,102.362 ; C8.2@143.918,67.083 C8.2 152.659,67.183 SW-B.3@161.434,58.408
  Bottom Layer w0.254: M2.3 87.806,82.661 ; R18.1 88.96,86.238 88.487,85.765 88.487,85.665 87.806,84.984 87.806,82.661 ; C5.2 106.211,74.162 ; C12.1 112.715,67.63 C11.1 ; C9.1 C10.1 112.776,69.789 C11.1 ; U4.1 115.676,98.371 113.278,98.371 111.039,100.609 108.642,100.609 107.958,99.925 107.958,85.209 111.567,81.6 C17.1@116.673,81.6 ; C17.1 C17.1@116.673,81.6 ; U3.35 125.635,81.236 126.13,80.742 126.13,80.718 126.233,80.614 126.233,80.283 125.73,79.779 125.73,77.303 125.48,77.053 ; 128.818,73.829 127.762,74.885 ; 128.827,73.839 129.425,73.24 U3.8 ; M3.3 130.478,103.554 155.626,103.554 156.292,102.889 175.078,102.889 176.197,101.77 176.197,100.668 175.078,99.549 172.816,99.549 172.421,99.154 147.034,99.154 146.538,98.657 ; 130.906,77.475 130.575,77.475 129.977,78.073 129.508,78.073 127.762,76.327 127.762,74.885 ; U3.47@131.01,77.578 131.034,77.578 131.528,78.073 U3.47 ; U3.47@131.565,78.073 132.06,78.567 132.083,78.567 132.187,78.671 132.519,78.671 132.852,78.337 132.852,78.222 133.001,78.073 135.096,78.073 ; 137.795,80.772 C14.1 ; C15.1 141.031,73.203 141.272,72.962 141.272,72.464 141.513,72.223 144.119,72.223 145.842,70.5 146.042,70.5 146.365,70.177 C18.1 146.365,68.455 149.187,65.633 149.187,64.681 153.915,64.681 160.053,58.543 160.627,58.543 161.434,57.737 SW-B.3 ; M4.3 144.264,100.719 145.026,100.719 145.161,100.584 145.161,100.034 146.538,98.657 ; H3.3 149.847,88.024 144.968,88.024 142.88,90.112 R5.2 R4.2 140.716,92.835 146.538,98.657 ; SW-G.3 166.655,95.219 C25.2 146.897,98.298 146.538,98.657 ; 87.806,82.661 C1.2 88.74,77.171 97.642,77.171 97.988,76.826 99.345,76.826 C3.N ; C3.N 101.944,79.425 C16.2 114.522,79.425 116.35,81.253 116.35,81.277 C17.1@116.673,81.6 ; C3.N 103.451,76.922 106.211,74.162 ; 106.211,74.162 106.211,74.801 106.988,75.578 108.47,75.578 109.12,74.928 109.12,69.971 C4.2 108.364,67.691 C11.1 ; 106.211,74.162 106.211,65.523 107.639,64.095 114.745,64.095 117.907,67.257 117.907,70.797 U3.23 123.533,76.422 124.849,76.422 125.48,77.053 ; 125.48,77.053 125.594,77.053 127.762,74.885
  other v1: 84,57 87,57 90,57 93,57 96,57 156,57 174,57 85.5,60 88.5,60 151.5,60 154.5,60 157.5,60 160.5,60 166.5,60 172.5,60 175.5,60 84,63 87,63 90,63 111,63 150,63 153,63 156,63 159,63 162,63 165,63 168,63 171,63 145.5,66 151.5,66 154.5,66 157.5,66 160.5,66 163.5,66 166.5,66 169.5,66 84,69 87,69 90,69 93,69 111,69 150,69 171,69 174,69 85.5,72 88.5,72 94.5,72 97.5,72 103.5,72 106.5,72 169.5,72 172.5,72 84,75 96,75 99,75 102,75 105,75 111,75 114,75 117,75 126,75 129,75 171,75 174,75 85.5,78 91.5,78 94.5,78 97.5,78 100.5,78 103.5,78 106.5,78 109.5,78 115.5,78 136.5,78 169.5,78 172.5,78 84,81 87,81 90,81 96,81 99,81 102,81 105,81 108,81 111,81 171,81 88.5,84 91.5,84 109.5,84 169.5,84 175.5,84 84,87 87,87 105,87 108,87 171,87 174,87 169.5,90 172.5,90 175.5,90 114,93 117,93 123,93 126,93 129,93 132,93 135,93 138,93 144,93 147,93 150,93 153,93 156,93 159,93 162,93 165,93 168,93 171,93 163.5,96 166.5,96 169.5,96 114,99 132,99 138,99 144,99 150,99 153,99 94.5,102 97.5,102 127.5,102 133.5,102 139.5,102 166.5,102 169.5,102 96,105 99,105 105,105 111,105 114,105 120,105 123,105 132,105 135,105 138,105 141,105 144,105 156,105 168,105 171,105 103.5,108 106.5,108 112.5,108 115.5,108 118.5,108 121.5,108 124.5,108 130.5,108 133.5,108 136.5,108 169.5,108 172.5,108 175.5,108 84,111 87,111 99,111 102,111 105,111 108,111 111,111 114,111 117,111 120,111 123,111 132,111 135,111 138,111 141,111 144,111 147,111 150,111 153,111 156,111 159,111 162,111 165,111 85.5,114 88.5,114 91.5,114 94.5,114 97.5,114 100.5,114 103.5,114 106.5,114 109.5,114 112.5,114 115.5,114 118.5,114 127.5,114 130.5,114 133.5,114 136.5,114 139.5,114 142.5,114 145.5,114 148.5,114 151.5,114 154.5,114 157.5,114 160.5,114 163.5,114 166.5,114 169.5,114 175.5,114 96,117 99,117 102,117 105,117 108,117 111,117 114,117 117,117 123,117 126,117 129,117 132,117 135,117 138,117 141,117 144,117 147,117 150,117 153,117 156,117 159,117 162,117 165,117 121.5,120 124.5,120 127.5,120 130.5,120 133.5,120 136.5,120 139.5,120 142.5,120 145.5,120 148.5,120 151.5,120 154.5,120 157.5,120 160.5,120 163.5,120 166.5,120 84,123 87,123 90,123 93,123 96,123 99,123 102,123 105,123 108,123 111,123 114,123 117,123 120,123 123,123 126,123 129,123 132,123 135,123 138,123 141,123 144,123 147,123 150,123 153,123 156,123 159,123 162,123 165,123 168,123 171,123 174,123
NetC8_1: C8.1 R2.1 U3.5 Y1.2 | length 19
  Top Layer w0.254: Y1.2 140.897,68.477 139.788,67.368 R2.1 C8.1
  Bottom Layer w0.254: U3.5 132.897,71.872 134.62,71.872 135.095,72.346 137.449,72.346 138.294,71.501 Y1.2
NetC13_1: C13.1 R2.2 U3.6 Y1.1 | length 14
  Top Layer w0.254: Y1.1 136.017,71.46 135.404,70.847 C13.1 R2.2
  Bottom Layer w0.254: U3.6 132.647,71.414 135.93,71.414 Y1.1
NetC14_2: C14.2 U3.3 Y2.4 | length 73
  Bottom Layer w0.254: U3.3 131.193,75.008 130.699,75.503 130.699,75.526 130.595,75.63 130.595,75.962 131.282,76.649 131.613,76.649 133.283,74.98 135.256,74.98 135.791,75.514 136.438,75.514 137.848,76.924 139.154,76.924 140.335,78.105 143.801,78.105 Y2.4@143.974,78.278 ; C14.2 142.367,80.572 142.69,80.249 152.606,80.249 157.023,75.832 166.94,75.832 167.881,74.89 167.881,73.954 167.219,73.292 150.09,73.292 145.467,77.914 144.147,77.914 143.974,78.087 Y2.4@143.974,78.278 ; Y2.4@143.974,78.987 Y2.4 Y2.4@143.974,78.278
NetC15_2: C15.2 U3.4 Y2.1 | length 16.4
  Bottom Layer w0.254: U3.4 133.147,72.329 134.431,72.329 136.285,74.183 141.119,74.183 141.577,73.726 141.777,73.726 142.1,73.403 C15.2 ; C15.2@142.24,73.203 143.974,74.937 Y2.1
NetC18_2: C18.2 R3.1 SW1.1 U3.7 | length 27.1
  Bottom Layer w0.254: U3.7 133.377,69.977 C18.2 144.465,69.777 141.78,67.092 141.78,66.786 SW1.1 141.78,65.04 141.78,64.592 144.223,62.149 144.304,62.23 R3.1
NetC19_1: C19.1 M1.1 R7.1 | length 6.7
  Top Layer w0.254: M1.1 94.71,87.184 94.942,87.184 95.415,87.657 C19.1 R7.1
NetC19_2: C19.2 R11.1 R17.2 U4.3 | length 48.9
  Top Layer w0.254: R17.2 97.315,83.18 C19.2 99.458,87.757 100.291,88.589 R11.1 100.491,88.589 100.964,88.116 100.964,87.916 101.727,87.153 v2(101.727,84.328)
  Bottom Layer w0.254: v2(101.727,84.328) 101.727,96.234 108.642,103.149 111.768,103.149 114.104,100.813 117.23,100.813 117.914,101.497 117.914,103.353 U4.3
NetC20_1: C20.1 R15.2 | length 3.8
  Top Layer w0.254: C20.1 101.244,106.426 102.235,107.417 R15.2
NetC22_1: C22.1 IC1.8 IC1.9 IC1.10 IC1.11 IC1.12 IC1.13 IC1.14 R6.1 | length 25.6
  Top Layer w0.254: C22.1 89.06,90.518 IC1.8 IC1.9 ; IC1.14 IC1.13 IC1.12 IC1.11 IC1.10 IC1.9 ; R6.1 95.161,96.647 IC1.9
NetC23_1: C23.1 C25.1 D3.C R24.1 | length 17.9
  Top Layer w0.254: 159.766,100.689 159.915,100.838 ; R24.1@166.778,107.574 R24.1
  Top Layer w1.27: D3.C 159.766,100.689 ; 159.915,100.838 C25.1 C23.1 165.122,105.918 R24.1@166.778,107.574
NetC23_2: C23.2 D1.C D2.A | length 20
  Top Layer w1.27: D1.C D2.A 155.575,100.457 C23.2
NetC24_1: C24.1 R22.2 U5.2 | length 44.2
  Top Layer w0.254: R22.2@126.392,110.485 R22.2 R22.2@126.554,110.547
  Top Layer w1.27: U5.2 117.751,119.126 R22.2@126.392,110.485 ; R22.2@126.554,110.547 C24.1
NetC26_1: C26.1 D2.C D3.A | length 14
  Top Layer w1.27: C26.1 152.631,105.791 D2.C D3.A
NetC26_2: C26.2 D1.A L3.2 M4.1 | length 23
  Top Layer w0.254: M4.1 146.431,103.581 145.808,104.204 145.808,107.2 C26.2 C26.2@147.141,108.533 ; D1.A@151.436,108.533 D1.A
  Top Layer w1.27: L3.2 138.43,108.331 C26.2 ; C26.2@147.141,108.533 D1.A@151.436,108.533
NetH3_1: H3.1 U3.37 | length 31.7
  Bottom Layer w0.254: U3.37 131.366,84.963 148.533,84.963 ccw(c149.392,85.979) 149.392,84.649 ccw(c149.392,85.979) 150.442,85.162 cw(c150.642,85.006) 150.842,85.162 ccw(c151.892,85.979) 152.942,85.163 cw(c153.142,85.006) 153.342,85.162 ccw(c154.392,85.979) 155.698,85.725 155.75,85.778 155.824,85.852 156.765,85.852 H3.1
NetH3_4: H3.4 U3.34 | length 35.8
  Bottom Layer w0.254: U3.34 124.46,81.723 124.46,84.709 125.984,86.233 132.334,86.233 137.795,91.694 139.081,91.694 139.881,90.894 139.881,88.821 140.686,88.016 140.922,88.252 143.784,88.252 146.057,85.979 H3.4
NetH4_2: H4.2 U3.12 | length 27.2
  Bottom Layer w0.254: U3.12 127,70.797 127,70.243 130.415,66.827 130.808,66.827 135.025,62.611 135.025,62.218 137.998,59.245 cw(c138.049,57.658) 139.199,58.752 ccw(c139.382,58.928) 139.204,58.747 139.278,58.674 139.382,58.674 142.066,58.674 142.638,59.245 144.89,59.245 145.631,58.505 145.631,58.445 146.304,57.772 H4.2
NetH4_3: H4.3 U3.13 | length 31.8
  Bottom Layer w0.254: U3.13 125.989,70.607 130.226,66.37 130.618,66.37 134.567,62.421 134.567,62.029 137.814,58.782 137.919,58.782 137.932,58.782 cw(c138.049,57.658) 139.054,58.175 ccw(c139.279,58.293) 139.245,58.041 139.262,58.039 139.279,58.039 142.078,58.039 142.827,58.788 144.701,58.788 145.174,58.315 145.174,57.19 145.836,56.528 146.772,56.528 147.663,57.419 148.605,57.419 H4.3
NetIC1_1: IC1.1 IC1.2 IC1.3 IC1.4 IC1.5 IC1.6 IC1.7 M2.2 R15.1 | length 39
  Top Layer w0.254: M2.2 84.547,88.46 84.547,93.945 IC1.7 IC1.6 IC1.5 IC1.4 IC1.3 IC1.2 IC1.1 88.636,109.347 89.531,110.242 93.02,110.242 94.54,108.722 97.247,108.722 97.872,109.347 R15.1
NetJP1_2: JP1.2 R4.1 U3.44 | length 23.1
  Bottom Layer w0.254: U3.44 130.468,79.133 129.869,78.535 129.514,78.535 127.059,80.99 127.059,81.321 131.158,85.42 137.617,85.42 JP1.2 139.319,87.486 138.816,87.989 R4.1
NetL1_2: L1.2 R1.1 | length 2
  Top Layer w0.254: R1.1 L1.2
NetL2_2: L2.2 R19.1 | length 3
  Top Layer w0.254: R19.1 125.725,98.176 L2.2
NetL4_2: L4.2 R23.1 | length 2.9
  Top Layer w0.254: R23.1 121.666,100.574 L4.2
NetM1_2: M1.2 M2.1 R10.1 | length 16.1
  Top Layer w0.254: M2.1 86.987,88.56 86.987,88.444 88.223,87.208 92.046,87.208 92.595,87.757 M1.2 94.15,89.164 94.15,91.18 95.415,92.445 R10.1
NetM1_3: M1.3 R18.2 | length 4.6
  Bottom Layer w0.254: R18.2 89.16,88.138 91.319,90.297 M1.3
NetM3_1: M3.1 R20.1 SW-G.2 | length 49.1
  Top Layer w0.254: M3.1 140.494,97.282 142.013,95.763 144.224,95.763 144.548,96.087 146.086,96.087 146.3,95.874 146.3,94.24 146.513,94.027 169.175,94.027 173.367,98.219 SW-G.2
NetM3_2: M3.2 R22.1 R25.2 | length 13.3
  Top Layer w0.254: R22.1 126.592,108.585 127.424,107.753 127.424,106.569 127.346,106.491 R25.2@127.346,105.729 ; R25.2@126.873,105.256 R25.2@127.346,105.729 ; M3.2 130.116,100.652 130.116,105.58 129.51,106.186 127.803,106.186 R25.2@127.346,105.729
NetM4_2: M4.2 R21.1 | length 7.2
  Top Layer w0.254: R21.1 147.25,99.354 147.701,99.805 147.701,100.584 148.09,100.973 148.852,100.973 M4.2
NetQ1_2: Q1.2 R14.1 SW-B.2 | length 107.6
  Top Layer w0.254: R14.1 114.233,91.44 113.303,90.51 113.303,88.803 114.25,87.856 Q1.2 114.565,86.294 115.774,87.503 v2(115.817,87.503) ; v2(117.729,79.121) 118.872,77.978 121.869,77.978 123.85,75.997 126.427,75.997 128.409,77.978 131.773,77.978 140.449,86.654 140.449,87.779 143.134,90.464 154.874,90.464 161.886,83.452 166.94,83.452 168.338,82.053 168.338,64.666 162.904,59.232 162.904,57.68 163.053,57.531 SW-B.2
  Bottom Layer w0.254: v2(115.817,87.503) 117.853,85.467 117.853,79.245 v2(117.729,79.121)
NetQ1_3: Q1.3 R9.1 R12.1 U4.7 | length 17.9
  Top Layer w0.254: U4.7 111.377,99.73 111.377,96.927 R12.1 111.85,91.383 R9.1 111.92,85.517 112.093,85.344 Q1.3
NetR5_1: R5.1 U3.20 | length 128.6
  Bottom Layer w0.254: U3.20 121.082,71.85 121.082,61.279 124.219,58.142 124.219,57.19 127.103,54.305 168.955,54.305 169.104,54.454 169.104,58.281 cw(c170.344,58.281) 169.104,58.29 cw(c170.434,58.281) 169.828,59.465 173.181,62.818 175.387,65.024 175.387,80.084 165.174,90.297 R5.1
NetR8_1: R8.1 R13.2 R16.2 U4.2 | length 20.4
  Top Layer w0.254: R8.1 105.697,101.346 R13.2 105.799,103.149 110.681,103.149 111.85,101.981 U4.2 114.933,100.168 114.933,96.993 R16.2
NetR13_1: R13.1 VR1.2 | length 3.8
  Top Layer w0.254: VR1.2 102.119,101.473 103.797,103.151 R13.1
NetR24_2: R24.2 U5.1 | length 11.9
  Top Layer w0.254: R24.2 R24.2@166.978,109.474
  Top Layer w1.27: R24.2@166.978,109.474 172.466,114.962 U5.1
PA0_TIM2_CH1: SW-B.1 U3.10 | length 50.7
  Bottom Layer w0.254: U3.10 128.718,72.496 129.213,72.002 129.213,71.978 129.785,71.406 129.785,71.372 140.404,60.753 140.415,60.753 140.589,60.579 147.521,60.579 149.987,58.113 149.987,54.911 150.136,54.762 167.285,54.762 167.434,54.911 SW-B.1
PA1: H1.1 U3.11 | length 44.5
  Top Layer w0.254: v2(130.137,68.542) 133.941,72.346 149.37,72.346 152.375,69.342 H1.1
  Bottom Layer w0.254: U3.11 128.365,72.143 128.859,71.648 128.859,71.625 128.963,71.521 128.963,71.189 128.629,70.856 128.514,70.856 128.365,70.707 128.365,70.315 v2(130.137,68.542) ; H1.1@166.624,69.469 H1.1
PA4: H5.8 U3.14 | length 23.8
  Bottom Layer w0.254: U3.14 124.605,71.132 124.605,66.062 124.754,65.913 130.429,65.913 134.11,62.232 134.11,61.597 H5.8
PA5: H5.7 U3.15 | length 22.6
  Bottom Layer w0.254: U3.15 124.148,71.381 124.148,65.242 124.297,65.093 127.767,65.093 134.328,58.532 135.27,58.532 135.27,57.897 H5.7
PA6: H5.6 U3.16 | length 21.3
  Bottom Layer w0.254: U3.16 124.036,71.976 123.975,71.976 123.536,71.536 123.536,65.059 127.508,61.087 129.233,61.087 131.788,58.532 132.73,58.532 132.73,57.897 H5.6
PA7: H5.5 U3.17 | length 20
  Bottom Layer w0.254: U3.17 122.907,71.554 122.907,64.665 123.056,64.516 123.334,64.516 129.299,58.551 130.171,58.551 130.171,57.916 H5.5
PA8_TIM1_CH1: SW-G.1 U3.29 | length 69.2
  Bottom Layer w0.254: U3.29 123.061,79.586 123.061,79.604 123.019,79.646 123.019,79.67 122.174,80.515 122.174,86.499 123.088,87.413 123.088,87.708 125.844,90.464 125.844,91.121 130.151,95.428 138.21,95.428 140.732,97.95 140.732,99.4 143.346,102.014 153.282,102.014 155.538,99.758 171.906,99.758 173.367,101.219 SW-G.1
PA9: H2.4 U3.30 | length 13.9
  Bottom Layer w0.254: U3.30 122.631,80.723 122.631,86.309 H2.4
PA10: H2.3 U3.31 | length 15.6
  Bottom Layer w0.254: U3.31 123.088,80.973 123.088,86.12 126.812,89.843 126.917,89.843 126.95,89.843 ccw(c127.254,90.932) 128.384,90.932 H2.3
PA11: H2.2 U3.32 | length 17
  Bottom Layer w0.254: U3.32 124.575,80.212 123.926,80.861 123.926,80.926 123.546,81.306 123.546,85.088 123.926,85.468 123.926,86.31 126.969,89.353 127.074,89.353 127.087,89.353 ccw(c127.254,90.932) 128.206,89.662 130.804,89.662 132.074,90.932 H2.2
PA12: H2.1 U3.33 | length 18.3
  Bottom Layer w0.254: U3.33 124.928,80.566 124.383,81.111 124.383,81.116 124.279,81.219 124.279,81.257 124.003,81.533 124.003,84.898 125.795,86.69 129.75,86.69 131.706,88.646 131.718,88.646 133.515,90.443 133.515,90.754 133.693,90.932 H2.1
PA15: H1.8 U3.38 | length 41.8
  Bottom Layer w0.254: U3.38 131.565,84.455 148.458,84.455 ccw(c149.392,85.979) 149.392,84.192 ccw(c149.392,85.979) 150.487,84.566 cw(c150.642,84.365) 150.797,84.566 ccw(c151.892,85.979) 152.987,84.566 cw(c153.142,84.365) 153.297,84.566 ccw(c154.392,85.979) 155.529,84.6 cw(c155.69,84.403) 155.755,84.649 158.029,84.649 158.222,84.842 158.222,85.703 158.371,85.852 159.232,85.852 160.502,87.122 H1.8
PB0: H5.4 U3.18 | length 19.5
  Bottom Layer w0.254: U3.18 122.45,71.804 122.45,62.738 122.572,62.738 126.759,58.551 127.631,58.551 127.631,57.916 H5.4
PB1: H5.3 U3.19 | length 18.8
  Bottom Layer w0.254: U3.19 122.618,72.679 121.539,71.601 121.539,61.468 H5.3
PB3: H1.7 U3.39 | length 39.8
  Bottom Layer w0.254: U3.39 131.791,83.974 148.384,83.974 ccw(c149.392,85.979) 149.392,83.734 ccw(c149.392,85.979) 150.516,84.036 cw(c150.642,83.816) 150.768,84.036 ccw(c151.892,85.979) 153.015,84.036 cw(c153.142,83.816) 153.269,84.036 ccw(c154.392,85.979) 155.683,84.143 155.896,84.143 155.945,84.192 158.218,84.192 158.609,84.582 H1.7
PB4_PWM: R21.2 U3.40 | length 24.8
  Top Layer w0.254: v2(134.891,82.533) 134.891,86.774 143.174,95.057 R21.2
  Bottom Layer w0.254: U3.40 129.09,80.548 129.585,81.042 129.609,81.042 131.099,82.533 132.265,82.533 132.359,82.626 133.579,82.626 133.673,82.533 v2(134.891,82.533)
PB5: H1.6 U3.41 | length 40.7
  Bottom Layer w0.254: U3.41 129.444,80.194 129.938,80.689 129.962,80.689 130.383,81.109 131.489,81.109 132.548,82.169 133.39,82.169 133.985,81.574 133.985,80.921 134.134,80.772 134.724,80.772 137.229,83.277 157.007,83.277 158.242,82.042 H1.6
PB6_GPIO: L4.1 U3.42 | length 31.3
  Top Layer w0.254: L4.1 119.38,94.343 118.504,93.467 118.504,88.138 125.984,88.138 v2(132.969,81.153)
  Bottom Layer w0.254: U3.42@129.761,79.84 U3.42 129.797,79.84 130.609,80.652 132.193,80.652 132.694,81.153 v2(132.969,81.153)
PB7: H1.5 U3.43 | length 39.4
  Bottom Layer w0.254: U3.43 130.151,79.487 130.645,79.981 130.669,79.981 130.773,80.085 134.684,80.085 137.418,82.82 156.817,82.82 158.053,81.585 164.668,81.585 H1.5
PB8: H1.4 U3.45 | length 39.6
  Bottom Layer w0.254: U3.45 130.858,78.78 131.353,79.274 131.376,79.274 131.687,79.585 134.83,79.585 137.608,82.363 156.628,82.363 159.398,79.593 164.12,79.593 H1.4
PB9: H1.3 U3.46 | length 41.3
  Bottom Layer w0.254: U3.46 131.212,78.426 131.706,78.921 131.73,78.921 131.937,79.128 132.708,79.128 133.223,78.613 134.874,78.613 138.167,81.906 140.97,81.906 141.375,81.5 141.375,80.197 141.78,79.792 144.236,79.792 149.606,74.422 H1.3
PB10: H5.2 U3.21 | length 20.3
  Bottom Layer w0.254: H5.2 118.999,61.468 118.999,70.475 U3.21
PB11: H5.1 U3.22 | length 20
  Bottom Layer w0.254: H5.1 118.364,59.563 118.364,70.547 U3.22
PB12: H2.7 U3.25 | length 13.9
  Bottom Layer w0.254: H2.7 119.634,80.155 U3.25@121.866,77.924
PB13: H2.6 U3.26 | length 14.6
  Bottom Layer w0.254: H2.6 122.174,89.789 120.193,87.808 120.193,80.387 120.396,80.183 120.396,80.112 121.623,78.884 121.642,78.884 U3.26
PB14: H2.5 U3.27 | length 15.1
  Bottom Layer w0.254: U3.27 122.807,78.438 121.618,79.626 121.6,79.626 120.724,80.502 120.65,80.576 120.65,85.987 120.724,86.061 120.774,86.111 ccw(c120.704,86.516) 120.876,86.142 124.467,89.733 ccw(c121.684,90.932) 124.487,89.781 ccw(c121.684,90.932) H2.5
PB15_GPIO: L2.1 U3.28 | length 28.6
  Top Layer w0.254: v2(121.529,93.301) 123.698,95.47 L2.1
  Bottom Layer w0.254: v2(121.529,93.301) 120.405,93.301 118.504,91.4 118.504,80.639 122.375,76.767 122.718,76.767 123.759,77.808 123.759,78.163 123.16,78.761 U3.28
PC13: H1.2 U3.2 | length 41.9
  Bottom Layer w0.254: U3.2 132.368,74.522 135.446,74.522 135.98,75.057 137.695,75.057 137.844,75.206 137.844,76.274 138.037,76.467 138.911,76.467 139.104,76.274 139.104,75.206 139.253,75.057 143.195,75.057 143.344,75.206 143.344,76.274 143.537,76.467 144.411,76.467 144.604,76.274 144.604,75.206 144.753,75.057 147.231,75.057 150.279,72.009 166.624,72.009 H1.2
pads on no net: J1.3 SW-B.4 SW-B.5 SW-G.4 SW-G.5 U1.4 U2.4 U3.1 U4.5 U4.6 Y2.2 Y2.3

## Polygon pours and split planes (outlines as drawn)
GND on Top Layer "GND_L01_P001" (solid, remove dead copper, pour order 1): 82.583,53.848 82.583,125.349 cw(c82.71,125.349) 82.711,125.476 177.673,125.476 cw(c177.673,125.349) 177.8,125.349 177.8,53.975 cw(c177.673,53.975) 177.783,53.911 cw(c177.673,53.848) 177.8,53.848 cw(c177.673,53.848) 177.673,53.721 82.71,53.721 cw(c82.71,53.848)
GND on Bottom Layer "GND_L02_P002" (solid, remove dead copper, pour order 2): 82.583,53.848 82.583,125.349 cw(c82.71,125.349) 82.711,125.476 177.673,125.476 cw(c177.673,125.349) 177.8,125.349 177.8,53.975 cw(c177.673,53.975) 177.783,53.911 cw(c177.673,53.848) 177.8,53.848 cw(c177.673,53.848) 177.673,53.721 82.71,53.721 cw(c82.71,53.848)

## Keep-outs
Keep-Out Layer:
  lines w0.254: 177.673,53.848 82.71,53.848 82.71,125.349 177.673,125.349 177.673,53.975

## Other copper
Top Layer:
  region net +5: 96.52,89.535 110.871,89.535 110.871,99.187 109.474,100.584 109.474,100.711 107.569,100.711 107.569,99.949 96.52,99.949 96.52,99.695
  region net +9: 90.17,64.262 99.06,55.372 108.458,55.372 108.458,56.642 108.458,56.896 106.553,56.896 106.553,62.103 108.712,62.103 108.712,67.564 105.918,67.564 100.558,72.771 98.742,72.771 98.742,72.072 98.742,64.511 93.853,64.511 93.853,67.691 90.17,67.691

## Silkscreen, mask and mechanical layers (free items; w line width, h text height)
Bottom Overlay:
  drawing of 31 lines, arcs and shapes, not listed
  text "HieuNDM" at 161.417,120.649 h1.52